# Altium PCB Altium_2023-04-22.pcbdoc (part 2 of 3)
Units mil, origin at the board's own origin, x right, y up, seen from the top; angles counter-clockwise.
Board outline 4864.16 x 2916.69 mil, 2 copper layers (Top Layer, Bottom Layer); 24 components, 36 nets, 126 pads, 11 vias.
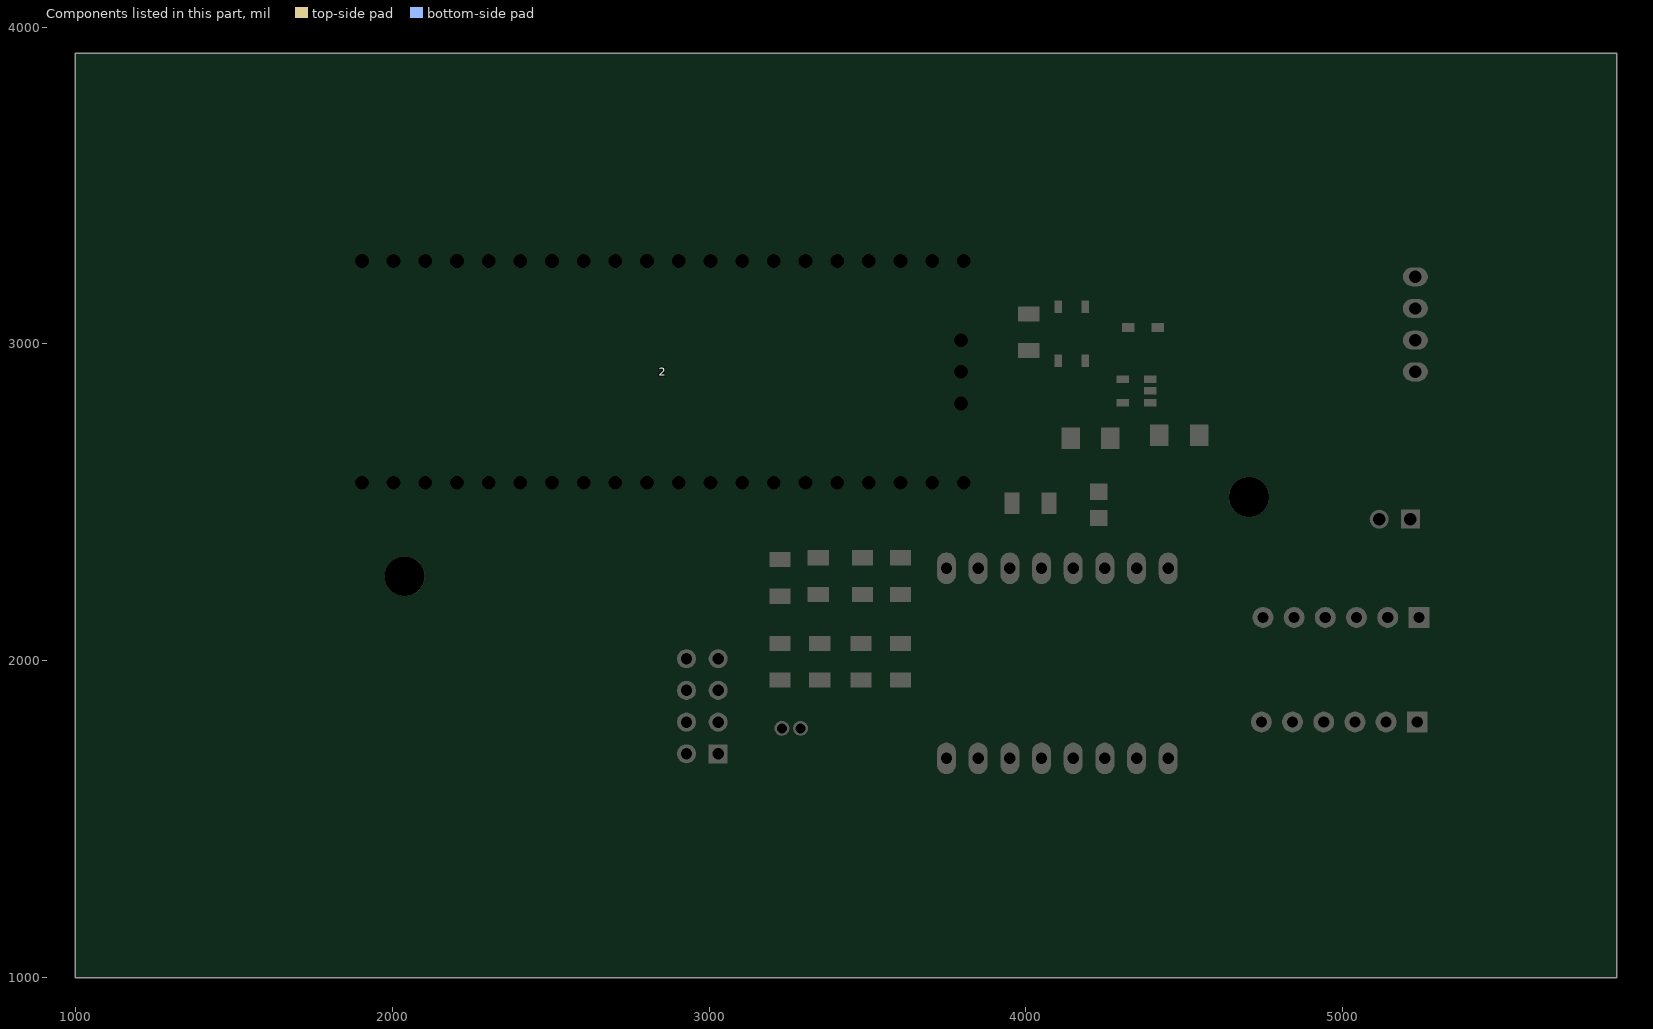
[diagram p2: the components of this part, seen from the top]

## Footprints (in the part's own frame and the unit in brackets; to place one, negate y for a bottom-side part, rotate by r counter-clockwise, add the part's x,y. Pads: shape width x height; smd on the part's side, far side on the other; paste and mask are expansions set on the pad) (continued)
RASPBERRYPIPICO [mil]
  round 0 hole 43.3 slot 43.31 at 90 deg: 3V3(OUT)(400,700) 3V3_EN(300,700) ADC_VREF(500,700) GND(200,0) GND1(700,0) GND2(1200,0) GND3(1700,0) GND4(200,700) GND5(700,700) GND6(1200,700) GND7(1700,700) GP0(0,0) GP1(100,0) GP2(300,0) GP3(400,0) GP4(500,0) GP5(600,0) GP6(800,0) GP7(900,0) GP8(1000,0) GP9(1100,0) GP10(1300,0) GP11(1400,0) GP12(1500,0) GP13(1600,0) GP14(1800,0) GP15(1900,0) GP16(1900,700) GP17(1800,700) GP18(1600,700) GP19(1500,700) GP20(1400,700) GP21(1300,700) GP22(1100,700) GP26(900,700) GP27(800,700) GP28(600,700) RUN(1000,700) VBUS(0,700) VSYS(100,700)
  round 0 hole 43.3 slot 43.31 at 0 deg: GND8(1890.94,350) SWCLK(1890.94,250) SWDIO(1890.94,450)
  Top Layer region: -32.48,0 -32.22,4.07 -31.46,8.08 -30.2,11.96 -28.46,15.65 -26.28,19.09 -23.68,22.23 -20.7,25.03 -17.4,27.42 -13.83,29.39 -10.04,30.89 -6.09,31.9 -2.04,32.42 2.04,32.42 6.09,31.9 10.04,30.89 13.83,29.39 17.4,27.42 20.7,25.03 23.68,22.23 26.28,19.09 28.46,15.65 30.2,11.96 31.46,8.08 32.22,4.07 32.48,0 32.48,-64.96 32.22,-69.03 31.46,-73.04 30.2,-76.92 28.46,-80.61 26.28,-84.05 23.68,-87.19 20.7,-89.99 17.4,-92.38 13.83,-94.35 10.04,-95.85 6.09,-96.87 2.04,-97.38 -2.04,-97.38 -6.09,-96.87 -10.04,-95.85 -13.83,-94.35 -17.4,-92.38 -20.7,-89.99 -23.68,-87.19 -26.28,-84.05 -28.46,-80.61 -30.2,-76.92 -31.46,-73.04 -32.22,-69.03 -32.48,-64.96
  Top Layer region: 67.52,0 67.78,4.07 68.54,8.08 69.8,11.96 71.54,15.65 73.72,19.09 76.32,22.23 79.3,25.03 82.6,27.42 86.17,29.39 89.96,30.89 93.91,31.9 97.96,32.42 102.04,32.42 106.09,31.9 110.04,30.89 113.83,29.39 117.4,27.42 120.7,25.03 123.68,22.23 126.28,19.09 128.46,15.65 130.2,11.96 131.46,8.08 132.22,4.07 132.48,0 132.48,-64.96 132.22,-69.03 131.46,-73.04 130.2,-76.92 128.46,-80.61 126.28,-84.05 123.68,-87.19 120.7,-89.99 117.4,-92.38 113.83,-94.35 110.04,-95.85 106.09,-96.87 102.04,-97.38 97.96,-97.38 93.91,-96.87 89.96,-95.85 86.17,-94.35 82.6,-92.38 79.3,-89.99 76.32,-87.19 73.72,-84.05 71.54,-80.61 69.8,-76.92 68.54,-73.04 67.78,-69.03 67.52,-64.96
  Top Layer region: 167.52,0 167.78,4.07 168.54,8.08 169.8,11.96 171.54,15.65 173.72,19.09 176.32,22.23 179.3,25.03 182.6,27.42 186.17,29.39 189.96,30.89 193.91,31.9 197.96,32.42 202.04,32.42 206.09,31.9 210.04,30.89 213.83,29.39 217.4,27.42 220.7,25.03 223.68,22.23 226.28,19.09 228.46,15.65 230.2,11.96 231.46,8.08 232.22,4.07 232.48,0 232.48,-64.96 232.22,-69.03 231.46,-73.04 230.2,-76.92 228.46,-80.61 226.28,-84.05 223.68,-87.19 220.7,-89.99 217.4,-92.38 213.83,-94.35 210.04,-95.85 206.09,-96.87 202.04,-97.38 197.96,-97.38 193.91,-96.87 189.96,-95.85 186.17,-94.35 182.6,-92.38 179.3,-89.99 176.32,-87.19 173.72,-84.05 171.54,-80.61 169.8,-76.92 168.54,-73.04 167.78,-69.03 167.52,-64.96
  Top Layer region: 267.52,0 267.78,4.07 268.54,8.08 269.8,11.96 271.54,15.65 273.72,19.09 276.32,22.23 279.3,25.03 282.6,27.42 286.17,29.39 289.96,30.89 293.91,31.9 297.96,32.42 302.04,32.42 306.09,31.9 310.04,30.89 313.83,29.39 317.4,27.42 320.7,25.03 323.68,22.23 326.28,19.09 328.46,15.65 330.2,11.96 331.46,8.08 332.22,4.07 332.48,0 332.48,-64.96 332.22,-69.03 331.46,-73.04 330.2,-76.92 328.46,-80.61 326.28,-84.05 323.68,-87.19 320.7,-89.99 317.4,-92.38 313.83,-94.35 310.04,-95.85 306.09,-96.87 302.04,-97.38 297.96,-97.38 293.91,-96.87 289.96,-95.85 286.17,-94.35 282.6,-92.38 279.3,-89.99 276.32,-87.19 273.72,-84.05 271.54,-80.61 269.8,-76.92 268.54,-73.04 267.78,-69.03 267.52,-64.96
  Top Layer region: 367.52,0 367.78,4.07 368.54,8.08 369.8,11.96 371.54,15.65 373.72,19.09 376.32,22.23 379.3,25.03 382.6,27.42 386.17,29.39 389.96,30.89 393.91,31.9 397.96,32.42 402.04,32.42 406.09,31.9 410.04,30.89 413.83,29.39 417.4,27.42 420.7,25.03 423.68,22.23 426.28,19.09 428.46,15.65 430.2,11.96 431.46,8.08 432.22,4.07 432.48,0 432.48,-64.96 432.22,-69.03 431.46,-73.04 430.2,-76.92 428.46,-80.61 426.28,-84.05 423.68,-87.19 420.7,-89.99 417.4,-92.38 413.83,-94.35 410.04,-95.85 406.09,-96.87 402.04,-97.38 397.96,-97.38 393.91,-96.87 389.96,-95.85 386.17,-94.35 382.6,-92.38 379.3,-89.99 376.32,-87.19 373.72,-84.05 371.54,-80.61 369.8,-76.92 368.54,-73.04 367.78,-69.03 367.52,-64.96
  Top Layer region: 467.52,0 467.77,4.07 468.54,8.08 469.8,11.96 471.54,15.65 473.72,19.09 476.32,22.23 479.3,25.03 482.6,27.42 486.17,29.39 489.96,30.89 493.91,31.9 497.96,32.42 502.04,32.42 506.09,31.9 510.04,30.89 513.83,29.39 517.4,27.42 520.7,25.03 523.68,22.23 526.28,19.09 528.46,15.65 530.2,11.96 531.46,8.08 532.22,4.07 532.48,0 532.48,-64.96 532.22,-69.03 531.46,-73.04 530.2,-76.92 528.46,-80.61 526.28,-84.05 523.68,-87.19 520.7,-89.99 517.4,-92.38 513.83,-94.35 510.04,-95.85 506.09,-96.87 502.04,-97.38 497.96,-97.38 493.91,-96.87 489.96,-95.85 486.17,-94.35 482.6,-92.38 479.3,-89.99 476.32,-87.19 473.72,-84.05 471.54,-80.61 469.8,-76.92 468.54,-73.04 467.77,-69.03 467.52,-64.96
  Top Layer region: 567.52,0 567.77,4.07 568.54,8.08 569.8,11.96 571.54,15.65 573.72,19.09 576.32,22.23 579.3,25.03 582.6,27.42 586.17,29.39 589.96,30.89 593.91,31.9 597.96,32.42 602.04,32.42 606.08,31.9 610.04,30.89 613.83,29.39 617.4,27.42 620.7,25.03 623.68,22.23 626.28,19.09 628.46,15.65 630.2,11.96 631.46,8.08 632.22,4.07 632.48,0 632.48,-64.96 632.22,-69.03 631.46,-73.04 630.2,-76.92 628.46,-80.61 626.28,-84.05 623.68,-87.19 620.7,-89.99 617.4,-92.38 613.83,-94.35 610.04,-95.85 606.08,-96.87 602.04,-97.38 597.96,-97.38 593.91,-96.87 589.96,-95.85 586.17,-94.35 582.6,-92.38 579.3,-89.99 576.32,-87.19 573.72,-84.05 571.54,-80.61 569.8,-76.92 568.54,-73.04 567.77,-69.03 567.52,-64.96
  Top Layer region: 667.52,0 667.77,4.07 668.54,8.08 669.8,11.96 671.54,15.65 673.72,19.09 676.32,22.23 679.29,25.03 682.59,27.42 686.17,29.39 689.96,30.89 693.91,31.9 697.96,32.42 702.04,32.42 706.08,31.9 710.04,30.89 713.83,29.39 717.4,27.42 720.7,25.03 723.68,22.23 726.28,19.09 728.46,15.65 730.2,11.96 731.46,8.08 732.22,4.07 732.48,0 732.48,-64.96 732.22,-69.03 731.46,-73.04 730.2,-76.92 728.46,-80.61 726.28,-84.05 723.68,-87.19 720.7,-89.99 717.4,-92.38 713.83,-94.35 710.04,-95.85 706.08,-96.87 702.04,-97.38 697.96,-97.38 693.91,-96.87 689.96,-95.85 686.17,-94.35 682.59,-92.38 679.29,-89.99 676.32,-87.19 673.72,-84.05 671.54,-80.61 669.8,-76.92 668.54,-73.04 667.77,-69.03 667.52,-64.96
  Top Layer region: 767.52,0 767.77,4.07 768.54,8.08 769.8,11.96 771.54,15.65 773.72,19.09 776.32,22.23 779.29,25.03 782.59,27.42 786.17,29.39 789.96,30.89 793.91,31.9 797.96,32.42 802.04,32.42 806.08,31.9 810.04,30.89 813.83,29.39 817.4,27.42 820.7,25.03 823.68,22.23 826.28,19.09 828.46,15.65 830.2,11.96 831.46,8.08 832.22,4.07 832.48,0 832.48,-64.96 832.22,-69.03 831.46,-73.04 830.2,-76.92 828.46,-80.61 826.28,-84.05 823.68,-87.19 820.7,-89.99 817.4,-92.38 813.83,-94.35 810.04,-95.85 806.08,-96.87 802.04,-97.38 797.96,-97.38 793.91,-96.87 789.96,-95.85 786.17,-94.35 782.59,-92.38 779.29,-89.99 776.32,-87.19 773.72,-84.05 771.54,-80.61 769.8,-76.92 768.54,-73.04 767.77,-69.03 767.52,-64.96
  Top Layer region: 867.52,0 867.77,4.07 868.54,8.08 869.8,11.96 871.54,15.65 873.72,19.09 876.32,22.23 879.29,25.03 882.59,27.42 886.17,29.39 889.96,30.89 893.91,31.9 897.96,32.42 902.04,32.42 906.08,31.9 910.04,30.89 913.83,29.39 917.4,27.42 920.7,25.03 923.68,22.23 926.28,19.09 928.46,15.65 930.2,11.96 931.46,8.08 932.22,4.07 932.48,0 932.48,-64.96 932.22,-69.03 931.46,-73.04 930.2,-76.92 928.46,-80.61 926.28,-84.05 923.68,-87.19 920.7,-89.99 917.4,-92.38 913.83,-94.35 910.04,-95.85 906.08,-96.87 902.04,-97.38 897.96,-97.38 893.91,-96.87 889.96,-95.85 886.17,-94.35 882.59,-92.38 879.29,-89.99 876.32,-87.19 873.72,-84.05 871.54,-80.61 869.8,-76.92 868.54,-73.04 867.77,-69.03 867.52,-64.96
  Top Layer region: 967.52,0 967.77,4.07 968.54,8.08 969.8,11.96 971.54,15.65 973.72,19.09 976.32,22.23 979.29,25.03 982.59,27.42 986.17,29.39 989.96,30.89 993.91,31.9 997.96,32.42 1002.04,32.42 1006.08,31.9 1010.03,30.89 1013.83,29.39 1017.4,27.42 1020.7,25.03 1023.68,22.23 1026.28,19.09 1028.46,15.65 1030.2,11.96 1031.46,8.08 1032.22,4.07 1032.48,0 1032.48,-64.96 1032.22,-69.03 1031.46,-73.04 1030.2,-76.92 1028.46,-80.61 1026.28,-84.05 1023.68,-87.19 1020.7,-89.99 1017.4,-92.38 1013.83,-94.35 1010.03,-95.85 1006.08,-96.87 1002.04,-97.38 997.96,-97.38 993.91,-96.87 989.96,-95.85 986.17,-94.35 982.59,-92.38 979.29,-89.99 976.32,-87.19 973.72,-84.05 971.54,-80.61 969.8,-76.92 968.54,-73.04 967.77,-69.03 967.52,-64.96
  Top Layer region: 1067.52,0 1067.77,4.07 1068.54,8.08 1069.8,11.96 1071.54,15.65 1073.72,19.09 1076.32,22.23 1079.29,25.03 1082.59,27.42 1086.17,29.39 1089.96,30.89 1093.91,31.9 1097.96,32.42 1102.04,32.42 1106.08,31.9 1110.03,30.89 1113.83,29.39 1117.4,27.42 1120.7,25.03 1123.67,22.23 1126.27,19.09 1128.46,15.65 1130.2,11.96 1131.46,8.08 1132.22,4.07 1132.48,0 1132.48,-64.96 1132.22,-69.03 1131.46,-73.04 1130.2,-76.92 1128.46,-80.61 1126.27,-84.05 1123.67,-87.19 1120.7,-89.99 1117.4,-92.38 1113.83,-94.35 1110.03,-95.85 1106.08,-96.87 1102.04,-97.38 1097.96,-97.38 1093.91,-96.87 1089.96,-95.85 1086.17,-94.35 1082.59,-92.38 1079.29,-89.99 1076.32,-87.19 1073.72,-84.05 1071.54,-80.61 1069.8,-76.92 1068.54,-73.04 1067.77,-69.03 1067.52,-64.96
  Top Layer region: 1167.52,0 1167.77,4.07 1168.54,8.08 1169.8,11.96 1171.53,15.65 1173.72,19.09 1176.32,22.23 1179.29,25.03 1182.59,27.42 1186.17,29.39 1189.96,30.89 1193.91,31.9 1197.96,32.42 1202.04,32.42 1206.08,31.9 1210.03,30.89 1213.83,29.39 1217.4,27.42 1220.7,25.03 1223.67,22.23 1226.27,19.09 1228.46,15.65 1230.2,11.96 1231.46,8.08 1232.22,4.07 1232.48,0 1232.48,-64.96 1232.22,-69.03 1231.46,-73.04 1230.2,-76.92 1228.46,-80.61 1226.27,-84.05 1223.67,-87.19 1220.7,-89.99 1217.4,-92.38 1213.83,-94.35 1210.03,-95.85 1206.08,-96.87 1202.04,-97.38 1197.96,-97.38 1193.91,-96.87 1189.96,-95.85 1186.17,-94.35 1182.59,-92.38 1179.29,-89.99 1176.32,-87.19 1173.72,-84.05 1171.53,-80.61 1169.8,-76.92 1168.54,-73.04 1167.77,-69.03 1167.52,-64.96
  Top Layer region: 1267.52,0 1267.77,4.07 1268.54,8.08 1269.8,11.96 1271.53,15.65 1273.72,19.09 1276.32,22.23 1279.29,25.03 1282.59,27.42 1286.17,29.39 1289.96,30.89 1293.91,31.9 1297.96,32.42 1302.04,32.42 1306.08,31.9 1310.03,30.89 1313.83,29.39 1317.4,27.42 1320.7,25.03 1323.67,22.23 1326.27,19.09 1328.46,15.65 1330.2,11.96 1331.46,8.08 1332.22,4.07 1332.48,0 1332.48,-64.96 1332.22,-69.03 1331.46,-73.04 1330.2,-76.92 1328.46,-80.61 1326.27,-84.05 1323.67,-87.19 1320.7,-89.99 1317.4,-92.38 1313.83,-94.35 1310.03,-95.85 1306.08,-96.87 1302.04,-97.38 1297.96,-97.38 1293.91,-96.87 1289.96,-95.85 1286.17,-94.35 1282.59,-92.38 1279.29,-89.99 1276.32,-87.19 1273.72,-84.05 1271.53,-80.61 1269.8,-76.92 1268.54,-73.04 1267.77,-69.03 1267.52,-64.96
  Top Layer region: 1367.52,0 1367.77,4.07 1368.54,8.08 1369.8,11.96 1371.53,15.65 1373.72,19.09 1376.32,22.23 1379.29,25.03 1382.59,27.42 1386.17,29.39 1389.96,30.89 1393.91,31.9 1397.96,32.42 1402.04,32.42 1406.08,31.9 1410.03,30.89 1413.83,29.39 1417.4,27.42 1420.7,25.03 1423.67,22.23 1426.27,19.09 1428.46,15.65 1430.2,11.96 1431.46,8.08 1432.22,4.07 1432.48,0 1432.48,-64.96 1432.22,-69.03 1431.46,-73.04 1430.2,-76.92 1428.46,-80.61 1426.27,-84.05 1423.67,-87.19 1420.7,-89.99 1417.4,-92.38 1413.83,-94.35 1410.03,-95.85 1406.08,-96.87 1402.04,-97.38 1397.96,-97.38 1393.91,-96.87 1389.96,-95.85 1386.17,-94.35 1382.59,-92.38 1379.29,-89.99 1376.32,-87.19 1373.72,-84.05 1371.53,-80.61 1369.8,-76.92 1368.54,-73.04 1367.77,-69.03 1367.52,-64.96
  Top Layer region: 1467.52,0 1467.77,4.07 1468.54,8.08 1469.8,11.96 1471.53,15.65 1473.72,19.09 1476.32,22.23 1479.29,25.03 1482.59,27.42 1486.17,29.39 1489.96,30.89 1493.91,31.9 1497.96,32.42 1502.04,32.42 1506.08,31.9 1510.03,30.89 1513.83,29.39 1517.4,27.42 1520.7,25.03 1523.67,22.23 1526.27,19.09 1528.46,15.65 1530.2,11.96 1531.46,8.08 1532.22,4.07 1532.48,0 1532.48,-64.96 1532.22,-69.03 1531.46,-73.04 1530.2,-76.92 1528.46,-80.61 1526.27,-84.05 1523.67,-87.19 1520.7,-89.99 1517.4,-92.38 1513.83,-94.35 1510.03,-95.85 1506.08,-96.87 1502.04,-97.38 1497.96,-97.38 1493.91,-96.87 1489.96,-95.85 1486.17,-94.35 1482.59,-92.38 1479.29,-89.99 1476.32,-87.19 1473.72,-84.05 1471.53,-80.61 1469.8,-76.92 1468.54,-73.04 1467.77,-69.03 1467.52,-64.96
  Top Layer region: 1567.52,0 1567.77,4.07 1568.54,8.08 1569.8,11.96 1571.53,15.65 1573.72,19.09 1576.32,22.23 1579.29,25.03 1582.59,27.42 1586.17,29.39 1589.96,30.89 1593.91,31.9 1597.96,32.42 1602.04,32.42 1606.08,31.9 1610.03,30.89 1613.83,29.39 1617.4,27.42 1620.7,25.03 1623.67,22.23 1626.27,19.09 1628.46,15.65 1630.2,11.96 1631.46,8.08 1632.22,4.07 1632.48,0 1632.48,-64.96 1632.22,-69.03 1631.46,-73.04 1630.2,-76.92 1628.46,-80.61 1626.27,-84.05 1623.67,-87.19 1620.7,-89.99 1617.4,-92.38 1613.83,-94.35 1610.03,-95.85 1606.08,-96.87 1602.04,-97.38 1597.96,-97.38 1593.91,-96.87 1589.96,-95.85 1586.17,-94.35 1582.59,-92.38 1579.29,-89.99 1576.32,-87.19 1573.72,-84.05 1571.53,-80.61 1569.8,-76.92 1568.54,-73.04 1567.77,-69.03 1567.52,-64.96
  Top Layer region: 1667.52,0 1667.77,4.07 1668.54,8.08 1669.8,11.96 1671.53,15.65 1673.72,19.09 1676.32,22.23 1679.29,25.03 1682.59,27.42 1686.17,29.39 1689.96,30.89 1693.91,31.9 1697.96,32.42 1702.04,32.42 1706.08,31.9 1710.03,30.89 1713.83,29.39 1717.4,27.42 1720.7,25.03 1723.67,22.23 1726.27,19.09 1728.46,15.65 1730.2,11.96 1731.46,8.08 1732.22,4.07 1732.48,0 1732.48,-64.96 1732.22,-69.03 1731.46,-73.04 1730.2,-76.92 1728.46,-80.61 1726.27,-84.05 1723.67,-87.19 1720.7,-89.99 1717.4,-92.38 1713.83,-94.35 1710.03,-95.85 1706.08,-96.87 1702.04,-97.38 1697.96,-97.38 1693.91,-96.87 1689.96,-95.85 1686.17,-94.35 1682.59,-92.38 1679.29,-89.99 1676.32,-87.19 1673.72,-84.05 1671.53,-80.61 1669.8,-76.92 1668.54,-73.04 1667.77,-69.03 1667.52,-64.96
  Top Layer region: 1767.52,0 1767.77,4.07 1768.54,8.08 1769.8,11.96 1771.53,15.65 1773.72,19.09 1776.32,22.23 1779.29,25.03 1782.59,27.42 1786.17,29.39 1789.96,30.89 1793.91,31.9 1797.96,32.42 1802.04,32.42 1806.08,31.9 1810.03,30.89 1813.83,29.39 1817.4,27.42 1820.7,25.03 1823.67,22.23 1826.27,19.09 1828.46,15.65 1830.2,11.96 1831.46,8.08 1832.22,4.07 1832.48,0 1832.48,-64.96 1832.22,-69.03 1831.46,-73.04 1830.2,-76.92 1828.46,-80.61 1826.27,-84.05 1823.67,-87.19 1820.7,-89.99 1817.4,-92.38 1813.83,-94.35 1810.03,-95.85 1806.08,-96.87 1802.04,-97.38 1797.96,-97.38 1793.91,-96.87 1789.96,-95.85 1786.17,-94.35 1782.59,-92.38 1779.29,-89.99 1776.32,-87.19 1773.72,-84.05 1771.53,-80.61 1769.8,-76.92 1768.54,-73.04 1767.77,-69.03 1767.52,-64.96
  Top Layer region: 1867.52,0 1867.77,4.07 1868.54,8.08 1869.8,11.96 1871.53,15.65 1873.72,19.09 1876.32,22.23 1879.29,25.03 1882.59,27.42 1886.17,29.39 1889.96,30.89 1893.91,31.9 1897.96,32.42 1902.04,32.42 1906.08,31.9 1910.03,30.89 1913.83,29.39 1917.4,27.42 1920.7,25.03 1923.67,22.23 1926.27,19.09 1928.46,15.65 1930.2,11.96 1931.46,8.08 1932.22,4.07 1932.48,0 1932.48,-64.96 1932.22,-69.03 1931.46,-73.04 1930.2,-76.92 1928.46,-80.61 1926.27,-84.05 1923.67,-87.19 1920.7,-89.99 1917.4,-92.38 1913.83,-94.35 1910.03,-95.85 1906.08,-96.87 1902.04,-97.38 1897.96,-97.38 1893.91,-96.87 1889.96,-95.85 1886.17,-94.35 1882.59,-92.38 1879.29,-89.99 1876.32,-87.19 1873.72,-84.05 1871.53,-80.61 1869.8,-76.92 1868.54,-73.04 1867.77,-69.03 1867.52,-64.96
  Top Layer region: 1932.48,700 1932.22,695.93 1931.46,691.92 1930.2,688.04 1928.46,684.35 1926.27,680.91 1923.67,677.76 1920.7,674.97 1917.4,672.57 1913.83,670.61 1910.03,669.11 1906.08,668.09 1902.04,667.58 1897.96,667.58 1893.91,668.09 1889.96,669.11 1886.17,670.61 1882.59,672.57 1879.29,674.97 1876.32,677.76 1873.72,680.91 1871.53,684.35 1869.8,688.04 1868.54,691.92 1867.77,695.93 1867.52,700 1867.52,764.96 1867.77,769.03 1868.54,773.04 1869.8,776.92 1871.53,780.61 1873.72,784.05 1876.32,787.19 1879.29,789.99 1882.59,792.38 1886.17,794.35 1889.96,795.85 1893.91,796.86 1897.96,797.38 1902.04,797.38 1906.08,796.86 1910.03,795.85 1913.83,794.35 1917.4,792.38 1920.7,789.99 1923.67,787.19 1926.27,784.05 1928.46,780.61 1930.2,776.92 1931.46,773.04 1932.22,769.03 1932.48,764.96
  Top Layer region: 1832.48,700 1832.22,695.93 1831.46,691.92 1830.2,688.04 1828.46,684.35 1826.27,680.91 1823.67,677.76 1820.7,674.97 1817.4,672.57 1813.83,670.61 1810.03,669.11 1806.08,668.09 1802.04,667.58 1797.96,667.58 1793.91,668.09 1789.96,669.11 1786.17,670.61 1782.59,672.57 1779.29,674.97 1776.32,677.76 1773.72,680.91 1771.53,684.35 1769.8,688.04 1768.54,691.92 1767.77,695.93 1767.52,700 1767.52,764.96 1767.77,769.03 1768.54,773.04 1769.8,776.92 1771.53,780.61 1773.72,784.05 1776.32,787.19 1779.29,789.99 1782.59,792.38 1786.17,794.35 1789.96,795.85 1793.91,796.86 1797.96,797.38 1802.04,797.38 1806.08,796.86 1810.03,795.85 1813.83,794.35 1817.4,792.38 1820.7,789.99 1823.67,787.19 1826.27,784.05 1828.46,780.61 1830.2,776.92 1831.46,773.04 1832.22,769.03 1832.48,764.96
  Top Layer region: 1732.48,700 1732.22,695.93 1731.46,691.92 1730.2,688.04 1728.46,684.35 1726.27,680.91 1723.67,677.76 1720.7,674.97 1717.4,672.57 1713.83,670.61 1710.03,669.11 1706.08,668.09 1702.04,667.58 1697.96,667.58 1693.91,668.09 1689.96,669.11 1686.17,670.61 1682.59,672.57 1679.29,674.97 1676.32,677.76 1673.72,680.91 1671.53,684.35 1669.8,688.04 1668.54,691.92 1667.77,695.93 1667.52,700 1667.52,764.96 1667.77,769.03 1668.54,773.04 1669.8,776.92 1671.53,780.61 1673.72,784.05 1676.32,787.19 1679.29,789.99 1682.59,792.38 1686.17,794.35 1689.96,795.85 1693.91,796.86 1697.96,797.38 1702.04,797.38 1706.08,796.86 1710.03,795.85 1713.83,794.35 1717.4,792.38 1720.7,789.99 1723.67,787.19 1726.27,784.05 1728.46,780.61 1730.2,776.92 1731.46,773.04 1732.22,769.03 1732.48,764.96
  Top Layer region: 1632.48,700 1632.22,695.93 1631.46,691.92 1630.2,688.04 1628.46,684.35 1626.27,680.91 1623.67,677.76 1620.7,674.97 1617.4,672.57 1613.83,670.61 1610.03,669.11 1606.08,668.09 1602.04,667.58 1597.96,667.58 1593.91,668.09 1589.96,669.11 1586.17,670.61 1582.59,672.57 1579.29,674.97 1576.32,677.76 1573.72,680.91 1571.53,684.35 1569.8,688.04 1568.54,691.92 1567.77,695.93 1567.52,700 1567.52,764.96 1567.77,769.03 1568.54,773.04 1569.8,776.92 1571.53,780.61 1573.72,784.05 1576.32,787.19 1579.29,789.99 1582.59,792.38 1586.17,794.35 1589.96,795.85 1593.91,796.86 1597.96,797.38 1602.04,797.38 1606.08,796.86 1610.03,795.85 1613.83,794.35 1617.4,792.38 1620.7,789.99 1623.67,787.19 1626.27,784.05 1628.46,780.61 1630.2,776.92 1631.46,773.04 1632.22,769.03 1632.48,764.96
  Top Layer region: 1532.48,700 1532.22,695.93 1531.46,691.92 1530.2,688.04 1528.46,684.35 1526.27,680.91 1523.67,677.76 1520.7,674.97 1517.4,672.57 1513.83,670.61 1510.03,669.11 1506.08,668.09 1502.04,667.58 1497.96,667.58 1493.91,668.09 1489.96,669.11 1486.17,670.61 1482.59,672.57 1479.29,674.97 1476.32,677.76 1473.72,680.91 1471.53,684.35 1469.8,688.04 1468.54,691.92 1467.77,695.93 1467.52,700 1467.52,764.96 1467.77,769.03 1468.54,773.04 1469.8,776.92 1471.53,780.61 1473.72,784.05 1476.32,787.19 1479.29,789.99 1482.59,792.38 1486.17,794.35 1489.96,795.85 1493.91,796.86 1497.96,797.38 1502.04,797.38 1506.08,796.86 1510.03,795.85 1513.83,794.35 1517.4,792.38 1520.7,789.99 1523.67,787.19 1526.27,784.05 1528.46,780.61 1530.2,776.92 1531.46,773.04 1532.22,769.03 1532.48,764.96
  Top Layer region: 1432.48,700 1432.22,695.93 1431.46,691.92 1430.2,688.04 1428.46,684.35 1426.27,680.91 1423.67,677.76 1420.7,674.97 1417.4,672.57 1413.83,670.61 1410.03,669.11 1406.08,668.09 1402.04,667.58 1397.96,667.58 1393.91,668.09 1389.96,669.11 1386.17,670.61 1382.59,672.57 1379.29,674.97 1376.32,677.76 1373.72,680.91 1371.53,684.35 1369.8,688.04 1368.54,691.92 1367.77,695.93 1367.52,700 1367.52,764.96 1367.77,769.03 1368.54,773.04 1369.8,776.92 1371.53,780.61 1373.72,784.05 1376.32,787.19 1379.29,789.99 1382.59,792.38 1386.17,794.35 1389.96,795.85 1393.91,796.86 1397.96,797.38 1402.04,797.38 1406.08,796.86 1410.03,795.85 1413.83,794.35 1417.4,792.38 1420.7,789.99 1423.67,787.19 1426.27,784.05 1428.46,780.61 1430.2,776.92 1431.46,773.04 1432.22,769.03 1432.48,764.96
  Top Layer region: 1332.48,700 1332.22,695.93 1331.46,691.92 1330.2,688.04 1328.46,684.35 1326.27,680.91 1323.67,677.76 1320.7,674.97 1317.4,672.57 1313.83,670.61 1310.03,669.11 1306.08,668.09 1302.04,667.58 1297.96,667.58 1293.91,668.09 1289.96,669.11 1286.17,670.61 1282.59,672.57 1279.29,674.97 1276.32,677.76 1273.72,680.91 1271.53,684.35 1269.8,688.04 1268.54,691.92 1267.77,695.93 1267.52,700 1267.52,764.96 1267.77,769.03 1268.54,773.04 1269.8,776.92 1271.53,780.61 1273.72,784.05 1276.32,787.19 1279.29,789.99 1282.59,792.38 1286.17,794.35 1289.96,795.85 1293.91,796.86 1297.96,797.38 1302.04,797.38 1306.08,796.86 1310.03,795.85 1313.83,794.35 1317.4,792.38 1320.7,789.99 1323.67,787.19 1326.27,784.05 1328.46,780.61 1330.2,776.92 1331.46,773.04 1332.22,769.03 1332.48,764.96
  Top Layer region: 1232.48,700 1232.22,695.93 1231.46,691.92 1230.2,688.04 1228.46,684.35 1226.27,680.91 1223.67,677.76 1220.7,674.97 1217.4,672.57 1213.83,670.61 1210.03,669.11 1206.08,668.09 1202.04,667.58 1197.96,667.58 1193.91,668.09 1189.96,669.11 1186.17,670.61 1182.59,672.57 1179.29,674.97 1176.32,677.76 1173.72,680.91 1171.53,684.35 1169.8,688.04 1168.54,691.92 1167.77,695.93 1167.52,700 1167.52,764.96 1167.77,769.03 1168.54,773.04 1169.8,776.92 1171.53,780.61 1173.72,784.05 1176.32,787.19 1179.29,789.99 1182.59,792.38 1186.17,794.35 1189.96,795.85 1193.91,796.86 1197.96,797.38 1202.04,797.38 1206.08,796.86 1210.03,795.85 1213.83,794.35 1217.4,792.38 1220.7,789.99 1223.67,787.19 1226.27,784.05 1228.46,780.61 1230.2,776.92 1231.46,773.04 1232.22,769.03 1232.48,764.96
  Top Layer region: 1132.48,700 1132.22,695.93 1131.46,691.92 1130.2,688.04 1128.46,684.35 1126.27,680.91 1123.67,677.76 1120.7,674.97 1117.4,672.57 1113.83,670.61 1110.03,669.11 1106.08,668.09 1102.04,667.58 1097.96,667.58 1093.91,668.09 1089.96,669.11 1086.17,670.61 1082.59,672.57 1079.29,674.97 1076.32,677.76 1073.72,680.91 1071.54,684.35 1069.8,688.04 1068.54,691.92 1067.77,695.93 1067.52,700 1067.52,764.96 1067.77,769.03 1068.54,773.04 1069.8,776.92 1071.54,780.61 1073.72,784.05 1076.32,787.19 1079.29,789.99 1082.59,792.38 1086.17,794.35 1089.96,795.85 1093.91,796.86 1097.96,797.38 1102.04,797.38 1106.08,796.86 1110.03,795.85 1113.83,794.35 1117.4,792.38 1120.7,789.99 1123.67,787.19 1126.27,784.05 1128.46,780.61 1130.2,776.92 1131.46,773.04 1132.22,769.03 1132.48,764.96
  Top Layer region: 1032.48,700 1032.22,695.93 1031.46,691.92 1030.2,688.04 1028.46,684.35 1026.28,680.91 1023.68,677.76 1020.7,674.97 1017.4,672.57 1013.83,670.61 1010.03,669.11 1006.08,668.09 1002.04,667.58 997.96,667.58 993.91,668.09 989.96,669.11 986.17,670.61 982.59,672.57 979.29,674.97 976.32,677.76 973.72,680.91 971.54,684.35 969.8,688.04 968.54,691.92 967.77,695.93 967.52,700 967.52,764.96 967.77,769.03 968.54,773.04 969.8,776.92 971.54,780.61 973.72,784.05 976.32,787.19 979.29,789.99 982.59,792.38 986.17,794.35 989.96,795.85 993.91,796.86 997.96,797.38 1002.04,797.38 1006.08,796.86 1010.03,795.85 1013.83,794.35 1017.4,792.38 1020.7,789.99 1023.68,787.19 1026.28,784.05 1028.46,780.61 1030.2,776.92 1031.46,773.04 1032.22,769.03 1032.48,764.96
  Top Layer region: 932.48,700 932.22,695.93 931.46,691.92 930.2,688.04 928.46,684.35 926.28,680.91 923.68,677.76 920.7,674.97 917.4,672.57 913.83,670.61 910.04,669.11 906.08,668.09 902.04,667.58 897.96,667.58 893.91,668.09 889.96,669.11 886.17,670.61 882.59,672.57 879.29,674.97 876.32,677.76 873.72,680.91 871.54,684.35 869.8,688.04 868.54,691.92 867.77,695.93 867.52,700 867.52,764.96 867.77,769.03 868.54,773.04 869.8,776.92 871.54,780.61 873.72,784.05 876.32,787.19 879.29,789.99 882.59,792.38 886.17,794.35 889.96,795.85 893.91,796.86 897.96,797.38 902.04,797.38 906.08,796.86 910.04,795.85 913.83,794.35 917.4,792.38 920.7,789.99 923.68,787.19 926.28,784.05 928.46,780.61 930.2,776.92 931.46,773.04 932.22,769.03 932.48,764.96
  Top Layer region: 832.48,700 832.22,695.93 831.46,691.92 830.2,688.04 828.46,684.35 826.28,680.91 823.68,677.76 820.7,674.97 817.4,672.57 813.83,670.61 810.04,669.11 806.08,668.09 802.04,667.58 797.96,667.58 793.91,668.09 789.96,669.11 786.17,670.61 782.59,672.57 779.29,674.97 776.32,677.76 773.72,680.91 771.54,684.35 769.8,688.04 768.54,691.92 767.77,695.93 767.52,700 767.52,764.96 767.77,769.03 768.54,773.04 769.8,776.92 771.54,780.61 773.72,784.05 776.32,787.19 779.29,789.99 782.59,792.38 786.17,794.35 789.96,795.85 793.91,796.86 797.96,797.38 802.04,797.38 806.08,796.86 810.04,795.85 813.83,794.35 817.4,792.38 820.7,789.99 823.68,787.19 826.28,784.05 828.46,780.61 830.2,776.92 831.46,773.04 832.22,769.03 832.48,764.96
  Top Layer region: 732.48,700 732.22,695.93 731.46,691.92 730.2,688.04 728.46,684.35 726.28,680.91 723.68,677.76 720.7,674.97 717.4,672.57 713.83,670.61 710.04,669.11 706.08,668.09 702.04,667.58 697.96,667.58 693.91,668.09 689.96,669.11 686.17,670.61 682.59,672.57 679.29,674.97 676.32,677.76 673.72,680.91 671.54,684.35 669.8,688.04 668.54,691.92 667.77,695.93 667.52,700 667.52,764.96 667.77,769.03 668.54,773.04 669.8,776.92 671.54,780.61 673.72,784.05 676.32,787.19 679.29,789.99 682.59,792.38 686.17,794.35 689.96,795.85 693.91,796.86 697.96,797.38 702.04,797.38 706.08,796.86 710.04,795.85 713.83,794.35 717.4,792.38 720.7,789.99 723.68,787.19 726.28,784.05 728.46,780.61 730.2,776.92 731.46,773.04 732.22,769.03 732.48,764.96
  Top Layer region: 632.48,700 632.22,695.93 631.46,691.92 630.2,688.04 628.46,684.35 626.28,680.91 623.68,677.76 620.7,674.97 617.4,672.57 613.83,670.61 610.04,669.11 606.08,668.09 602.04,667.58 597.96,667.58 593.91,668.09 589.96,669.11 586.17,670.61 582.6,672.57 579.3,674.97 576.32,677.76 573.72,680.91 571.54,684.35 569.8,688.04 568.54,691.92 567.77,695.93 567.52,700 567.52,764.96 567.77,769.03 568.54,773.04 569.8,776.92 571.54,780.61 573.72,784.05 576.32,787.19 579.3,789.99 582.6,792.38 586.17,794.35 589.96,795.85 593.91,796.86 597.96,797.38 602.04,797.38 606.08,796.86 610.04,795.85 613.83,794.35 617.4,792.38 620.7,789.99 623.68,787.19 626.28,784.05 628.46,780.61 630.2,776.92 631.46,773.04 632.22,769.03 632.48,764.96
  Top Layer region: 532.48,700 532.22,695.93 531.46,691.92 530.2,688.04 528.46,684.35 526.28,680.91 523.68,677.76 520.7,674.97 517.4,672.57 513.83,670.61 510.04,669.11 506.09,668.09 502.04,667.58 497.96,667.58 493.91,668.09 489.96,669.11 486.17,670.61 482.6,672.57 479.3,674.97 476.32,677.76 473.72,680.91 471.54,684.35 469.8,688.04 468.54,691.92 467.77,695.93 467.52,700 467.52,764.96 467.77,769.03 468.54,773.04 469.8,776.92 471.54,780.61 473.72,784.05 476.32,787.19 479.3,789.99 482.6,792.38 486.17,794.35 489.96,795.85 493.91,796.86 497.96,797.38 502.04,797.38 506.09,796.86 510.04,795.85 513.83,794.35 517.4,792.38 520.7,789.99 523.68,787.19 526.28,784.05 528.46,780.61 530.2,776.92 531.46,773.04 532.22,769.03 532.48,764.96
  Top Layer region: 432.48,700 432.22,695.93 431.46,691.92 430.2,688.04 428.46,684.35 426.28,680.91 423.68,677.76 420.7,674.97 417.4,672.57 413.83,670.61 410.04,669.11 406.09,668.09 402.04,667.58 397.96,667.58 393.91,668.09 389.96,669.11 386.17,670.61 382.6,672.57 379.3,674.97 376.32,677.76 373.72,680.91 371.54,684.35 369.8,688.04 368.54,691.92 367.78,695.93 367.52,700 367.52,764.96 367.78,769.03 368.54,773.04 369.8,776.92 371.54,780.61 373.72,784.05 376.32,787.19 379.3,789.99 382.6,792.38 386.17,794.35 389.96,795.85 393.91,796.86 397.96,797.38 402.04,797.38 406.09,796.86 410.04,795.85 413.83,794.35 417.4,792.38 420.7,789.99 423.68,787.19 426.28,784.05 428.46,780.61 430.2,776.92 431.46,773.04 432.22,769.03 432.48,764.96
  Top Layer region: 332.48,700 332.22,695.93 331.46,691.92 330.2,688.04 328.46,684.35 326.28,680.91 323.68,677.76 320.7,674.97 317.4,672.57 313.83,670.61 310.04,669.11 306.09,668.09 302.04,667.58 297.96,667.58 293.91,668.09 289.96,669.11 286.17,670.61 282.6,672.57 279.3,674.97 276.32,677.76 273.72,680.91 271.54,684.35 269.8,688.04 268.54,691.92 267.78,695.93 267.52,700 267.52,764.96 267.78,769.03 268.54,773.04 269.8,776.92 271.54,780.61 273.72,784.05 276.32,787.19 279.3,789.99 282.6,792.38 286.17,794.35 289.96,795.85 293.91,796.86 297.96,797.38 302.04,797.38 306.09,796.86 310.04,795.85 313.83,794.35 317.4,792.38 320.7,789.99 323.68,787.19 326.28,784.05 328.46,780.61 330.2,776.92 331.46,773.04 332.22,769.03 332.48,764.96
  Top Layer region: 232.48,700 232.22,695.93 231.46,691.92 230.2,688.04 228.46,684.35 226.28,680.91 223.68,677.76 220.7,674.97 217.4,672.57 213.83,670.61 210.04,669.11 206.09,668.09 202.04,667.58 197.96,667.58 193.91,668.09 189.96,669.11 186.17,670.61 182.6,672.57 179.3,674.97 176.32,677.76 173.72,680.91 171.54,684.35 169.8,688.04 168.54,691.92 167.78,695.93 167.52,700 167.52,764.96 167.78,769.03 168.54,773.04 169.8,776.92 171.54,780.61 173.72,784.05 176.32,787.19 179.3,789.99 182.6,792.38 186.17,794.35 189.96,795.85 193.91,796.86 197.96,797.38 202.04,797.38 206.09,796.86 210.04,795.85 213.83,794.35 217.4,792.38 220.7,789.99 223.68,787.19 226.28,784.05 228.46,780.61 230.2,776.92 231.46,773.04 232.22,769.03 232.48,764.96
  Top Layer region: 132.48,700 132.22,695.93 131.46,691.92 130.2,688.04 128.46,684.35 126.28,680.91 123.68,677.76 120.7,674.97 117.4,672.57 113.83,670.61 110.04,669.11 106.09,668.09 102.04,667.58 97.96,667.58 93.91,668.09 89.96,669.11 86.17,670.61 82.6,672.57 79.3,674.97 76.32,677.76 73.72,680.91 71.54,684.35 69.8,688.04 68.54,691.92 67.78,695.93 67.52,700 67.52,764.96 67.78,769.03 68.54,773.04 69.8,776.92 71.54,780.61 73.72,784.05 76.32,787.19 79.3,789.99 82.6,792.38 86.17,794.35 89.96,795.85 93.91,796.86 97.96,797.38 102.04,797.38 106.09,796.86 110.04,795.85 113.83,794.35 117.4,792.38 120.7,789.99 123.68,787.19 126.28,784.05 128.46,780.61 130.2,776.92 131.46,773.04 132.22,769.03 132.48,764.96
  Top Layer region: 32.48,700 32.22,695.93 31.46,691.92 30.2,688.04 28.46,684.35 26.28,680.91 23.68,677.76 20.7,674.97 17.4,672.57 13.83,670.61 10.04,669.11 6.09,668.09 2.04,667.58 -2.04,667.58 -6.09,668.09 -10.04,669.11 -13.83,670.61 -17.4,672.57 -20.7,674.97 -23.68,677.76 -26.28,680.91 -28.46,684.35 -30.2,688.04 -31.46,691.92 -32.22,695.93 -32.48,700 -32.48,764.96 -32.22,769.03 -31.46,773.04 -30.2,776.92 -28.46,780.61 -26.28,784.05 -23.68,787.19 -20.7,789.99 -17.4,792.38 -13.83,794.35 -10.04,795.85 -6.09,796.86 -2.04,797.38 2.04,797.38 6.09,796.86 10.04,795.85 13.83,794.35 17.4,792.38 20.7,789.99 23.68,787.19 26.28,784.05 28.46,780.61 30.2,776.92 31.46,773.04 32.22,769.03 32.48,764.96
  Top Layer region: 1890.94,217.52 1886.87,217.78 1882.86,218.54 1878.98,219.8 1875.29,221.54 1871.85,223.72 1868.71,226.32 1865.91,229.3 1863.52,232.6 1861.55,236.17 1860.05,239.96 1859.04,243.91 1858.52,247.96 1858.52,252.04 1859.04,256.09 1860.05,260.04 1861.55,263.83 1863.52,267.4 1865.91,270.7 1868.71,273.68 1871.85,276.28 1875.29,278.46 1878.98,280.2 1882.86,281.46 1886.87,282.22 1890.94,282.48 1955.9,282.48 1959.97,282.22 1963.98,281.46 1967.86,280.2 1971.55,278.46 1974.99,276.28 1978.14,273.68 1980.93,270.7 1983.33,267.4 1985.29,263.83 1986.79,260.04 1987.81,256.09 1988.32,252.04 1988.32,247.96 1987.81,243.91 1986.79,239.96 1985.29,236.17 1983.33,232.6 1980.93,229.3 1978.14,226.32 1974.99,223.72 1971.55,221.54 1967.86,219.8 1963.98,218.54 1959.97,217.78 1955.9,217.52
  Top Layer region: 1890.94,317.52 1886.87,317.78 1882.86,318.54 1878.98,319.8 1875.29,321.54 1871.85,323.72 1868.71,326.32 1865.91,329.3 1863.52,332.6 1861.55,336.17 1860.05,339.96 1859.04,343.91 1858.52,347.96 1858.52,352.04 1859.04,356.09 1860.05,360.04 1861.55,363.83 1863.52,367.4 1865.91,370.7 1868.71,373.68 1871.85,376.28 1875.29,378.46 1878.98,380.2 1882.86,381.46 1886.87,382.22 1890.94,382.48 1955.9,382.48 1959.97,382.22 1963.98,381.46 1967.86,380.2 1971.55,378.46 1974.99,376.28 1978.14,373.68 1980.93,370.7 1983.33,367.4 1985.29,363.83 1986.79,360.04 1987.81,356.09 1988.32,352.04 1988.32,347.96 1987.81,343.91 1986.79,339.96 1985.29,336.17 1983.33,332.6 1980.93,329.3 1978.14,326.32 1974.99,323.72 1971.55,321.54 1967.86,319.8 1963.98,318.54 1959.97,317.78 1955.9,317.52
  Top Layer region: 1890.94,417.52 1886.87,417.77 1882.86,418.54 1878.98,419.8 1875.29,421.54 1871.85,423.72 1868.71,426.32 1865.91,429.3 1863.52,432.6 1861.55,436.17 1860.05,439.96 1859.04,443.91 1858.52,447.96 1858.52,452.04 1859.04,456.09 1860.05,460.04 1861.55,463.83 1863.52,467.4 1865.91,470.7 1868.71,473.68 1871.85,476.28 1875.29,478.46 1878.98,480.2 1882.86,481.46 1886.87,482.22 1890.94,482.48 1955.9,482.48 1959.97,482.22 1963.98,481.46 1967.86,480.2 1971.55,478.46 1974.99,476.28 1978.14,473.68 1980.93,470.7 1983.33,467.4 1985.29,463.83 1986.79,460.04 1987.81,456.09 1988.32,452.04 1988.32,447.96 1987.81,443.91 1986.79,439.96 1985.29,436.17 1983.33,432.6 1980.93,429.3 1978.14,426.32 1974.99,423.72 1971.55,421.54 1967.86,419.8 1963.98,418.54 1959.97,417.77 1955.9,417.52
  Bottom Layer region: -32.48,0 -32.22,4.07 -31.46,8.08 -30.2,11.96 -28.46,15.65 -26.28,19.09 -23.68,22.23 -20.7,25.03 -17.4,27.42 -13.83,29.39 -10.04,30.89 -6.09,31.9 -2.04,32.42 2.04,32.42 6.09,31.9 10.04,30.89 13.83,29.39 17.4,27.42 20.7,25.03 23.68,22.23 26.28,19.09 28.46,15.65 30.2,11.96 31.46,8.08 32.22,4.07 32.48,0 32.48,-64.96 32.22,-69.03 31.46,-73.04 30.2,-76.92 28.46,-80.61 26.28,-84.05 23.68,-87.19 20.7,-89.99 17.4,-92.38 13.83,-94.35 10.04,-95.85 6.09,-96.87 2.04,-97.38 -2.04,-97.38 -6.09,-96.87 -10.04,-95.85 -13.83,-94.35 -17.4,-92.38 -20.7,-89.99 -23.68,-87.19 -26.28,-84.05 -28.46,-80.61 -30.2,-76.92 -31.46,-73.04 -32.22,-69.03 -32.48,-64.96
  Bottom Layer region: 67.52,0 67.78,4.07 68.54,8.08 69.8,11.96 71.54,15.65 73.72,19.09 76.32,22.23 79.3,25.03 82.6,27.42 86.17,29.39 89.96,30.89 93.91,31.9 97.96,32.42 102.04,32.42 106.09,31.9 110.04,30.89 113.83,29.39 117.4,27.42 120.7,25.03 123.68,22.23 126.28,19.09 128.46,15.65 130.2,11.96 131.46,8.08 132.22,4.07 132.48,0 132.48,-64.96 132.22,-69.03 131.46,-73.04 130.2,-76.92 128.46,-80.61 126.28,-84.05 123.68,-87.19 120.7,-89.99 117.4,-92.38 113.83,-94.35 110.04,-95.85 106.09,-96.87 102.04,-97.38 97.96,-97.38 93.91,-96.87 89.96,-95.85 86.17,-94.35 82.6,-92.38 79.3,-89.99 76.32,-87.19 73.72,-84.05 71.54,-80.61 69.8,-76.92 68.54,-73.04 67.78,-69.03 67.52,-64.96
  Bottom Layer region: 167.52,0 167.78,4.07 168.54,8.08 169.8,11.96 171.54,15.65 173.72,19.09 176.32,22.23 179.3,25.03 182.6,27.42 186.17,29.39 189.96,30.89 193.91,31.9 197.96,32.42 202.04,32.42 206.09,31.9 210.04,30.89 213.83,29.39 217.4,27.42 220.7,25.03 223.68,22.23 226.28,19.09 228.46,15.65 230.2,11.96 231.46,8.08 232.22,4.07 232.48,0 232.48,-64.96 232.22,-69.03 231.46,-73.04 230.2,-76.92 228.46,-80.61 226.28,-84.05 223.68,-87.19 220.7,-89.99 217.4,-92.38 213.83,-94.35 210.04,-95.85 206.09,-96.87 202.04,-97.38 197.96,-97.38 193.91,-96.87 189.96,-95.85 186.17,-94.35 182.6,-92.38 179.3,-89.99 176.32,-87.19 173.72,-84.05 171.54,-80.61 169.8,-76.92 168.54,-73.04 167.78,-69.03 167.52,-64.96
  Bottom Layer region: 267.52,0 267.78,4.07 268.54,8.08 269.8,11.96 271.54,15.65 273.72,19.09 276.32,22.23 279.3,25.03 282.6,27.42 286.17,29.39 289.96,30.89 293.91,31.9 297.96,32.42 302.04,32.42 306.09,31.9 310.04,30.89 313.83,29.39 317.4,27.42 320.7,25.03 323.68,22.23 326.28,19.09 328.46,15.65 330.2,11.96 331.46,8.08 332.22,4.07 332.48,0 332.48,-64.96 332.22,-69.03 331.46,-73.04 330.2,-76.92 328.46,-80.61 326.28,-84.05 323.68,-87.19 320.7,-89.99 317.4,-92.38 313.83,-94.35 310.04,-95.85 306.09,-96.87 302.04,-97.38 297.96,-97.38 293.91,-96.87 289.96,-95.85 286.17,-94.35 282.6,-92.38 279.3,-89.99 276.32,-87.19 273.72,-84.05 271.54,-80.61 269.8,-76.92 268.54,-73.04 267.78,-69.03 267.52,-64.96
  Bottom Layer region: 367.52,0 367.78,4.07 368.54,8.08 369.8,11.96 371.54,15.65 373.72,19.09 376.32,22.23 379.3,25.03 382.6,27.42 386.17,29.39 389.96,30.89 393.91,31.9 397.96,32.42 402.04,32.42 406.09,31.9 410.04,30.89 413.83,29.39 417.4,27.42 420.7,25.03 423.68,22.23 426.28,19.09 428.46,15.65 430.2,11.96 431.46,8.08 432.22,4.07 432.48,0 432.48,-64.96 432.22,-69.03 431.46,-73.04 430.2,-76.92 428.46,-80.61 426.28,-84.05 423.68,-87.19 420.7,-89.99 417.4,-92.38 413.83,-94.35 410.04,-95.85 406.09,-96.87 402.04,-97.38 397.96,-97.38 393.91,-96.87 389.96,-95.85 386.17,-94.35 382.6,-92.38 379.3,-89.99 376.32,-87.19 373.72,-84.05 371.54,-80.61 369.8,-76.92 368.54,-73.04 367.78,-69.03 367.52,-64.96
  Bottom Layer region: 467.52,0 467.77,4.07 468.54,8.08 469.8,11.96 471.54,15.65 473.72,19.09 476.32,22.23 479.3,25.03 482.6,27.42 486.17,29.39 489.96,30.89 493.91,31.9 497.96,32.42 502.04,32.42 506.09,31.9 510.04,30.89 513.83,29.39 517.4,27.42 520.7,25.03 523.68,22.23 526.28,19.09 528.46,15.65 530.2,11.96 531.46,8.08 532.22,4.07 532.48,0 532.48,-64.96 532.22,-69.03 531.46,-73.04 530.2,-76.92 528.46,-80.61 526.28,-84.05 523.68,-87.19 520.7,-89.99 517.4,-92.38 513.83,-94.35 510.04,-95.85 506.09,-96.87 502.04,-97.38 497.96,-97.38 493.91,-96.87 489.96,-95.85 486.17,-94.35 482.6,-92.38 479.3,-89.99 476.32,-87.19 473.72,-84.05 471.54,-80.61 469.8,-76.92 468.54,-73.04 467.77,-69.03 467.52,-64.96
  Bottom Layer region: 567.52,0 567.77,4.07 568.54,8.08 569.8,11.96 571.54,15.65 573.72,19.09 576.32,22.23 579.3,25.03 582.6,27.42 586.17,29.39 589.96,30.89 593.91,31.9 597.96,32.42 602.04,32.42 606.08,31.9 610.04,30.89 613.83,29.39 617.4,27.42 620.7,25.03 623.68,22.23 626.28,19.09 628.46,15.65 630.2,11.96 631.46,8.08 632.22,4.07 632.48,0 632.48,-64.96 632.22,-69.03 631.46,-73.04 630.2,-76.92 628.46,-80.61 626.28,-84.05 623.68,-87.19 620.7,-89.99 617.4,-92.38 613.83,-94.35 610.04,-95.85 606.08,-96.87 602.04,-97.38 597.96,-97.38 593.91,-96.87 589.96,-95.85 586.17,-94.35 582.6,-92.38 579.3,-89.99 576.32,-87.19 573.72,-84.05 571.54,-80.61 569.8,-76.92 568.54,-73.04 567.77,-69.03 567.52,-64.96
  Bottom Layer region: 667.52,0 667.77,4.07 668.54,8.08 669.8,11.96 671.54,15.65 673.72,19.09 676.32,22.23 679.29,25.03 682.59,27.42 686.17,29.39 689.96,30.89 693.91,31.9 697.96,32.42 702.04,32.42 706.08,31.9 710.04,30.89 713.83,29.39 717.4,27.42 720.7,25.03 723.68,22.23 726.28,19.09 728.46,15.65 730.2,11.96 731.46,8.08 732.22,4.07 732.48,0 732.48,-64.96 732.22,-69.03 731.46,-73.04 730.2,-76.92 728.46,-80.61 726.28,-84.05 723.68,-87.19 720.7,-89.99 717.4,-92.38 713.83,-94.35 710.04,-95.85 706.08,-96.87 702.04,-97.38 697.96,-97.38 693.91,-96.87 689.96,-95.85 686.17,-94.35 682.59,-92.38 679.29,-89.99 676.32,-87.19 673.72,-84.05 671.54,-80.61 669.8,-76.92 668.54,-73.04 667.77,-69.03 667.52,-64.96
  Bottom Layer region: 767.52,0 767.77,4.07 768.54,8.08 769.8,11.96 771.54,15.65 773.72,19.09 776.32,22.23 779.29,25.03 782.59,27.42 786.17,29.39 789.96,30.89 793.91,31.9 797.96,32.42 802.04,32.42 806.08,31.9 810.04,30.89 813.83,29.39 817.4,27.42 820.7,25.03 823.68,22.23 826.28,19.09 828.46,15.65 830.2,11.96 831.46,8.08 832.22,4.07 832.48,0 832.48,-64.96 832.22,-69.03 831.46,-73.04 830.2,-76.92 828.46,-80.61 826.28,-84.05 823.68,-87.19 820.7,-89.99 817.4,-92.38 813.83,-94.35 810.04,-95.85 806.08,-96.87 802.04,-97.38 797.96,-97.38 793.91,-96.87 789.96,-95.85 786.17,-94.35 782.59,-92.38 779.29,-89.99 776.32,-87.19 773.72,-84.05 771.54,-80.61 769.8,-76.92 768.54,-73.04 767.77,-69.03 767.52,-64.96
  Bottom Layer region: 867.52,0 867.77,4.07 868.54,8.08 869.8,11.96 871.54,15.65 873.72,19.09 876.32,22.23 879.29,25.03 882.59,27.42 886.17,29.39 889.96,30.89 893.91,31.9 897.96,32.42 902.04,32.42 906.08,31.9 910.04,30.89 913.83,29.39 917.4,27.42 920.7,25.03 923.68,22.23 926.28,19.09 928.46,15.65 930.2,11.96 931.46,8.08 932.22,4.07 932.48,0 932.48,-64.96 932.22,-69.03 931.46,-73.04 930.2,-76.92 928.46,-80.61 926.28,-84.05 923.68,-87.19 920.7,-89.99 917.4,-92.38 913.83,-94.35 910.04,-95.85 906.08,-96.87 902.04,-97.38 897.96,-97.38 893.91,-96.87 889.96,-95.85 886.17,-94.35 882.59,-92.38 879.29,-89.99 876.32,-87.19 873.72,-84.05 871.54,-80.61 869.8,-76.92 868.54,-73.04 867.77,-69.03 867.52,-64.96
  Bottom Layer region: 967.52,0 967.77,4.07 968.54,8.08 969.8,11.96 971.54,15.65 973.72,19.09 976.32,22.23 979.29,25.03 982.59,27.42 986.17,29.39 989.96,30.89 993.91,31.9 997.96,32.42 1002.04,32.42 1006.08,31.9 1010.03,30.89 1013.83,29.39 1017.4,27.42 1020.7,25.03 1023.68,22.23 1026.28,19.09 1028.46,15.65 1030.2,11.96 1031.46,8.08 1032.22,4.07 1032.48,0 1032.48,-64.96 1032.22,-69.03 1031.46,-73.04 1030.2,-76.92 1028.46,-80.61 1026.28,-84.05 1023.68,-87.19 1020.7,-89.99 1017.4,-92.38 1013.83,-94.35 1010.03,-95.85 1006.08,-96.87 1002.04,-97.38 997.96,-97.38 993.91,-96.87 989.96,-95.85 986.17,-94.35 982.59,-92.38 979.29,-89.99 976.32,-87.19 973.72,-84.05 971.54,-80.61 969.8,-76.92 968.54,-73.04 967.77,-69.03 967.52,-64.96
  Bottom Layer region: 1067.52,0 1067.77,4.07 1068.54,8.08 1069.8,11.96 1071.54,15.65 1073.72,19.09 1076.32,22.23 1079.29,25.03 1082.59,27.42 1086.17,29.39 1089.96,30.89 1093.91,31.9 1097.96,32.42 1102.04,32.42 1106.08,31.9 1110.03,30.89 1113.83,29.39 1117.4,27.42 1120.7,25.03 1123.67,22.23 1126.27,19.09 1128.46,15.65 1130.2,11.96 1131.46,8.08 1132.22,4.07 1132.48,0 1132.48,-64.96 1132.22,-69.03 1131.46,-73.04 1130.2,-76.92 1128.46,-80.61 1126.27,-84.05 1123.67,-87.19 1120.7,-89.99 1117.4,-92.38 1113.83,-94.35 1110.03,-95.85 1106.08,-96.87 1102.04,-97.38 1097.96,-97.38 1093.91,-96.87 1089.96,-95.85 1086.17,-94.35 1082.59,-92.38 1079.29,-89.99 1076.32,-87.19 1073.72,-84.05 1071.54,-80.61 1069.8,-76.92 1068.54,-73.04 1067.77,-69.03 1067.52,-64.96
  Bottom Layer region: 1167.52,0 1167.77,4.07 1168.54,8.08 1169.8,11.96 1171.53,15.65 1173.72,19.09 1176.32,22.23 1179.29,25.03 1182.59,27.42 1186.17,29.39 1189.96,30.89 1193.91,31.9 1197.96,32.42 1202.04,32.42 1206.08,31.9 1210.03,30.89 1213.83,29.39 1217.4,27.42 1220.7,25.03 1223.67,22.23 1226.27,19.09 1228.46,15.65 1230.2,11.96 1231.46,8.08 1232.22,4.07 1232.48,0 1232.48,-64.96 1232.22,-69.03 1231.46,-73.04 1230.2,-76.92 1228.46,-80.61 1226.27,-84.05 1223.67,-87.19 1220.7,-89.99 1217.4,-92.38 1213.83,-94.35 1210.03,-95.85 1206.08,-96.87 1202.04,-97.38 1197.96,-97.38 1193.91,-96.87 1189.96,-95.85 1186.17,-94.35 1182.59,-92.38 1179.29,-89.99 1176.32,-87.19 1173.72,-84.05 1171.53,-80.61 1169.8,-76.92 1168.54,-73.04 1167.77,-69.03 1167.52,-64.96
  Bottom Layer region: 1267.52,0 1267.77,4.07 1268.54,8.08 1269.8,11.96 1271.53,15.65 1273.72,19.09 1276.32,22.23 1279.29,25.03 1282.59,27.42 1286.17,29.39 1289.96,30.89 1293.91,31.9 1297.96,32.42 1302.04,32.42 1306.08,31.9 1310.03,30.89 1313.83,29.39 1317.4,27.42 1320.7,25.03 1323.67,22.23 1326.27,19.09 1328.46,15.65 1330.2,11.96 1331.46,8.08 1332.22,4.07 1332.48,0 1332.48,-64.96 1332.22,-69.03 1331.46,-73.04 1330.2,-76.92 1328.46,-80.61 1326.27,-84.05 1323.67,-87.19 1320.7,-89.99 1317.4,-92.38 1313.83,-94.35 1310.03,-95.85 1306.08,-96.87 1302.04,-97.38 1297.96,-97.38 1293.91,-96.87 1289.96,-95.85 1286.17,-94.35 1282.59,-92.38 1279.29,-89.99 1276.32,-87.19 1273.72,-84.05 1271.53,-80.61 1269.8,-76.92 1268.54,-73.04 1267.77,-69.03 1267.52,-64.96
  Bottom Layer region: 1367.52,0 1367.77,4.07 1368.54,8.08 1369.8,11.96 1371.53,15.65 1373.72,19.09 1376.32,22.23 1379.29,25.03 1382.59,27.42 1386.17,29.39 1389.96,30.89 1393.91,31.9 1397.96,32.42 1402.04,32.42 1406.08,31.9 1410.03,30.89 1413.83,29.39 1417.4,27.42 1420.7,25.03 1423.67,22.23 1426.27,19.09 1428.46,15.65 1430.2,11.96 1431.46,8.08 1432.22,4.07 1432.48,0 1432.48,-64.96 1432.22,-69.03 1431.46,-73.04 1430.2,-76.92 1428.46,-80.61 1426.27,-84.05 1423.67,-87.19 1420.7,-89.99 1417.4,-92.38 1413.83,-94.35 1410.03,-95.85 1406.08,-96.87 1402.04,-97.38 1397.96,-97.38 1393.91,-96.87 1389.96,-95.85 1386.17,-94.35 1382.59,-92.38 1379.29,-89.99 1376.32,-87.19 1373.72,-84.05 1371.53,-80.61 1369.8,-76.92 1368.54,-73.04 1367.77,-69.03 1367.52,-64.96
  Bottom Layer region: 1467.52,0 1467.77,4.07 1468.54,8.08 1469.8,11.96 1471.53,15.65 1473.72,19.09 1476.32,22.23 1479.29,25.03 1482.59,27.42 1486.17,29.39 1489.96,30.89 1493.91,31.9 1497.96,32.42 1502.04,32.42 1506.08,31.9 1510.03,30.89 1513.83,29.39 1517.4,27.42 1520.7,25.03 1523.67,22.23 1526.27,19.09 1528.46,15.65 1530.2,11.96 1531.46,8.08 1532.22,4.07 1532.48,0 1532.48,-64.96 1532.22,-69.03 1531.46,-73.04 1530.2,-76.92 1528.46,-80.61 1526.27,-84.05 1523.67,-87.19 1520.7,-89.99 1517.4,-92.38 1513.83,-94.35 1510.03,-95.85 1506.08,-96.87 1502.04,-97.38 1497.96,-97.38 1493.91,-96.87 1489.96,-95.85 1486.17,-94.35 1482.59,-92.38 1479.29,-89.99 1476.32,-87.19 1473.72,-84.05 1471.53,-80.61 1469.8,-76.92 1468.54,-73.04 1467.77,-69.03 1467.52,-64.96
  Bottom Layer region: 1567.52,0 1567.77,4.07 1568.54,8.08 1569.8,11.96 1571.53,15.65 1573.72,19.09 1576.32,22.23 1579.29,25.03 1582.59,27.42 1586.17,29.39 1589.96,30.89 1593.91,31.9 1597.96,32.42 1602.04,32.42 1606.08,31.9 1610.03,30.89 1613.83,29.39 1617.4,27.42 1620.7,25.03 1623.67,22.23 1626.27,19.09 1628.46,15.65 1630.2,11.96 1631.46,8.08 1632.22,4.07 1632.48,0 1632.48,-64.96 1632.22,-69.03 1631.46,-73.04 1630.2,-76.92 1628.46,-80.61 1626.27,-84.05 1623.67,-87.19 1620.7,-89.99 1617.4,-92.38 1613.83,-94.35 1610.03,-95.85 1606.08,-96.87 1602.04,-97.38 1597.96,-97.38 1593.91,-96.87 1589.96,-95.85 1586.17,-94.35 1582.59,-92.38 1579.29,-89.99 1576.32,-87.19 1573.72,-84.05 1571.53,-80.61 1569.8,-76.92 1568.54,-73.04 1567.77,-69.03 1567.52,-64.96
  Bottom Layer region: 1667.52,0 1667.77,4.07 1668.54,8.08 1669.8,11.96 1671.53,15.65 1673.72,19.09 1676.32,22.23 1679.29,25.03 1682.59,27.42 1686.17,29.39 1689.96,30.89 1693.91,31.9 1697.96,32.42 1702.04,32.42 1706.08,31.9 1710.03,30.89 1713.83,29.39 1717.4,27.42 1720.7,25.03 1723.67,22.23 1726.27,19.09 1728.46,15.65 1730.2,11.96 1731.46,8.08 1732.22,4.07 1732.48,0 1732.48,-64.96 1732.22,-69.03 1731.46,-73.04 1730.2,-76.92 1728.46,-80.61 1726.27,-84.05 1723.67,-87.19 1720.7,-89.99 1717.4,-92.38 1713.83,-94.35 1710.03,-95.85 1706.08,-96.87 1702.04,-97.38 1697.96,-97.38 1693.91,-96.87 1689.96,-95.85 1686.17,-94.35 1682.59,-92.38 1679.29,-89.99 1676.32,-87.19 1673.72,-84.05 1671.53,-80.61 1669.8,-76.92 1668.54,-73.04 1667.77,-69.03 1667.52,-64.96
  Bottom Layer region: 1767.52,0 1767.77,4.07 1768.54,8.08 1769.8,11.96 1771.53,15.65 1773.72,19.09 1776.32,22.23 1779.29,25.03 1782.59,27.42 1786.17,29.39 1789.96,30.89 1793.91,31.9 1797.96,32.42 1802.04,32.42 1806.08,31.9 1810.03,30.89 1813.83,29.39 1817.4,27.42 1820.7,25.03 1823.67,22.23 1826.27,19.09 1828.46,15.65 1830.2,11.96 1831.46,8.08 1832.22,4.07 1832.48,0 1832.48,-64.96 1832.22,-69.03 1831.46,-73.04 1830.2,-76.92 1828.46,-80.61 1826.27,-84.05 1823.67,-87.19 1820.7,-89.99 1817.4,-92.38 1813.83,-94.35 1810.03,-95.85 1806.08,-96.87 1802.04,-97.38 1797.96,-97.38 1793.91,-96.87 1789.96,-95.85 1786.17,-94.35 1782.59,-92.38 1779.29,-89.99 1776.32,-87.19 1773.72,-84.05 1771.53,-80.61 1769.8,-76.92 1768.54,-73.04 1767.77,-69.03 1767.52,-64.96
  Bottom Layer region: 1867.52,0 1867.77,4.07 1868.54,8.08 1869.8,11.96 1871.53,15.65 1873.72,19.09 1876.32,22.23 1879.29,25.03 1882.59,27.42 1886.17,29.39 1889.96,30.89 1893.91,31.9 1897.96,32.42 1902.04,32.42 1906.08,31.9 1910.03,30.89 1913.83,29.39 1917.4,27.42 1920.7,25.03 1923.67,22.23 1926.27,19.09 1928.46,15.65 1930.2,11.96 1931.46,8.08 1932.22,4.07 1932.48,0 1932.48,-64.96 1932.22,-69.03 1931.46,-73.04 1930.2,-76.92 1928.46,-80.61 1926.27,-84.05 1923.67,-87.19 1920.7,-89.99 1917.4,-92.38 1913.83,-94.35 1910.03,-95.85 1906.08,-96.87 1902.04,-97.38 1897.96,-97.38 1893.91,-96.87 1889.96,-95.85 1886.17,-94.35 1882.59,-92.38 1879.29,-89.99 1876.32,-87.19 1873.72,-84.05 1871.53,-80.61 1869.8,-76.92 1868.54,-73.04 1867.77,-69.03 1867.52,-64.96
  Bottom Layer region: 1932.48,700 1932.22,695.93 1931.46,691.92 1930.2,688.04 1928.46,684.35 1926.27,680.91 1923.67,677.76 1920.7,674.97 1917.4,672.57 1913.83,670.61 1910.03,669.11 1906.08,668.09 1902.04,667.58 1897.96,667.58 1893.91,668.09 1889.96,669.11 1886.17,670.61 1882.59,672.57 1879.29,674.97 1876.32,677.76 1873.72,680.91 1871.53,684.35 1869.8,688.04 1868.54,691.92 1867.77,695.93 1867.52,700 1867.52,764.96 1867.77,769.03 1868.54,773.04 1869.8,776.92 1871.53,780.61 1873.72,784.05 1876.32,787.19 1879.29,789.99 1882.59,792.38 1886.17,794.35 1889.96,795.85 1893.91,796.86 1897.96,797.38 1902.04,797.38 1906.08,796.86 1910.03,795.85 1913.83,794.35 1917.4,792.38 1920.7,789.99 1923.67,787.19 1926.27,784.05 1928.46,780.61 1930.2,776.92 1931.46,773.04 1932.22,769.03 1932.48,764.96